# Altium PCB EV_PCB.PcbDoc
Units mm, origin at the board's own origin, x right, y up, seen from the top; angles counter-clockwise.
Board outline 110.4 x 66.4 mm, 2 copper layers (Top Layer, Bottom Layer); 33 components, 22 nets, 88 pads, 0 vias.
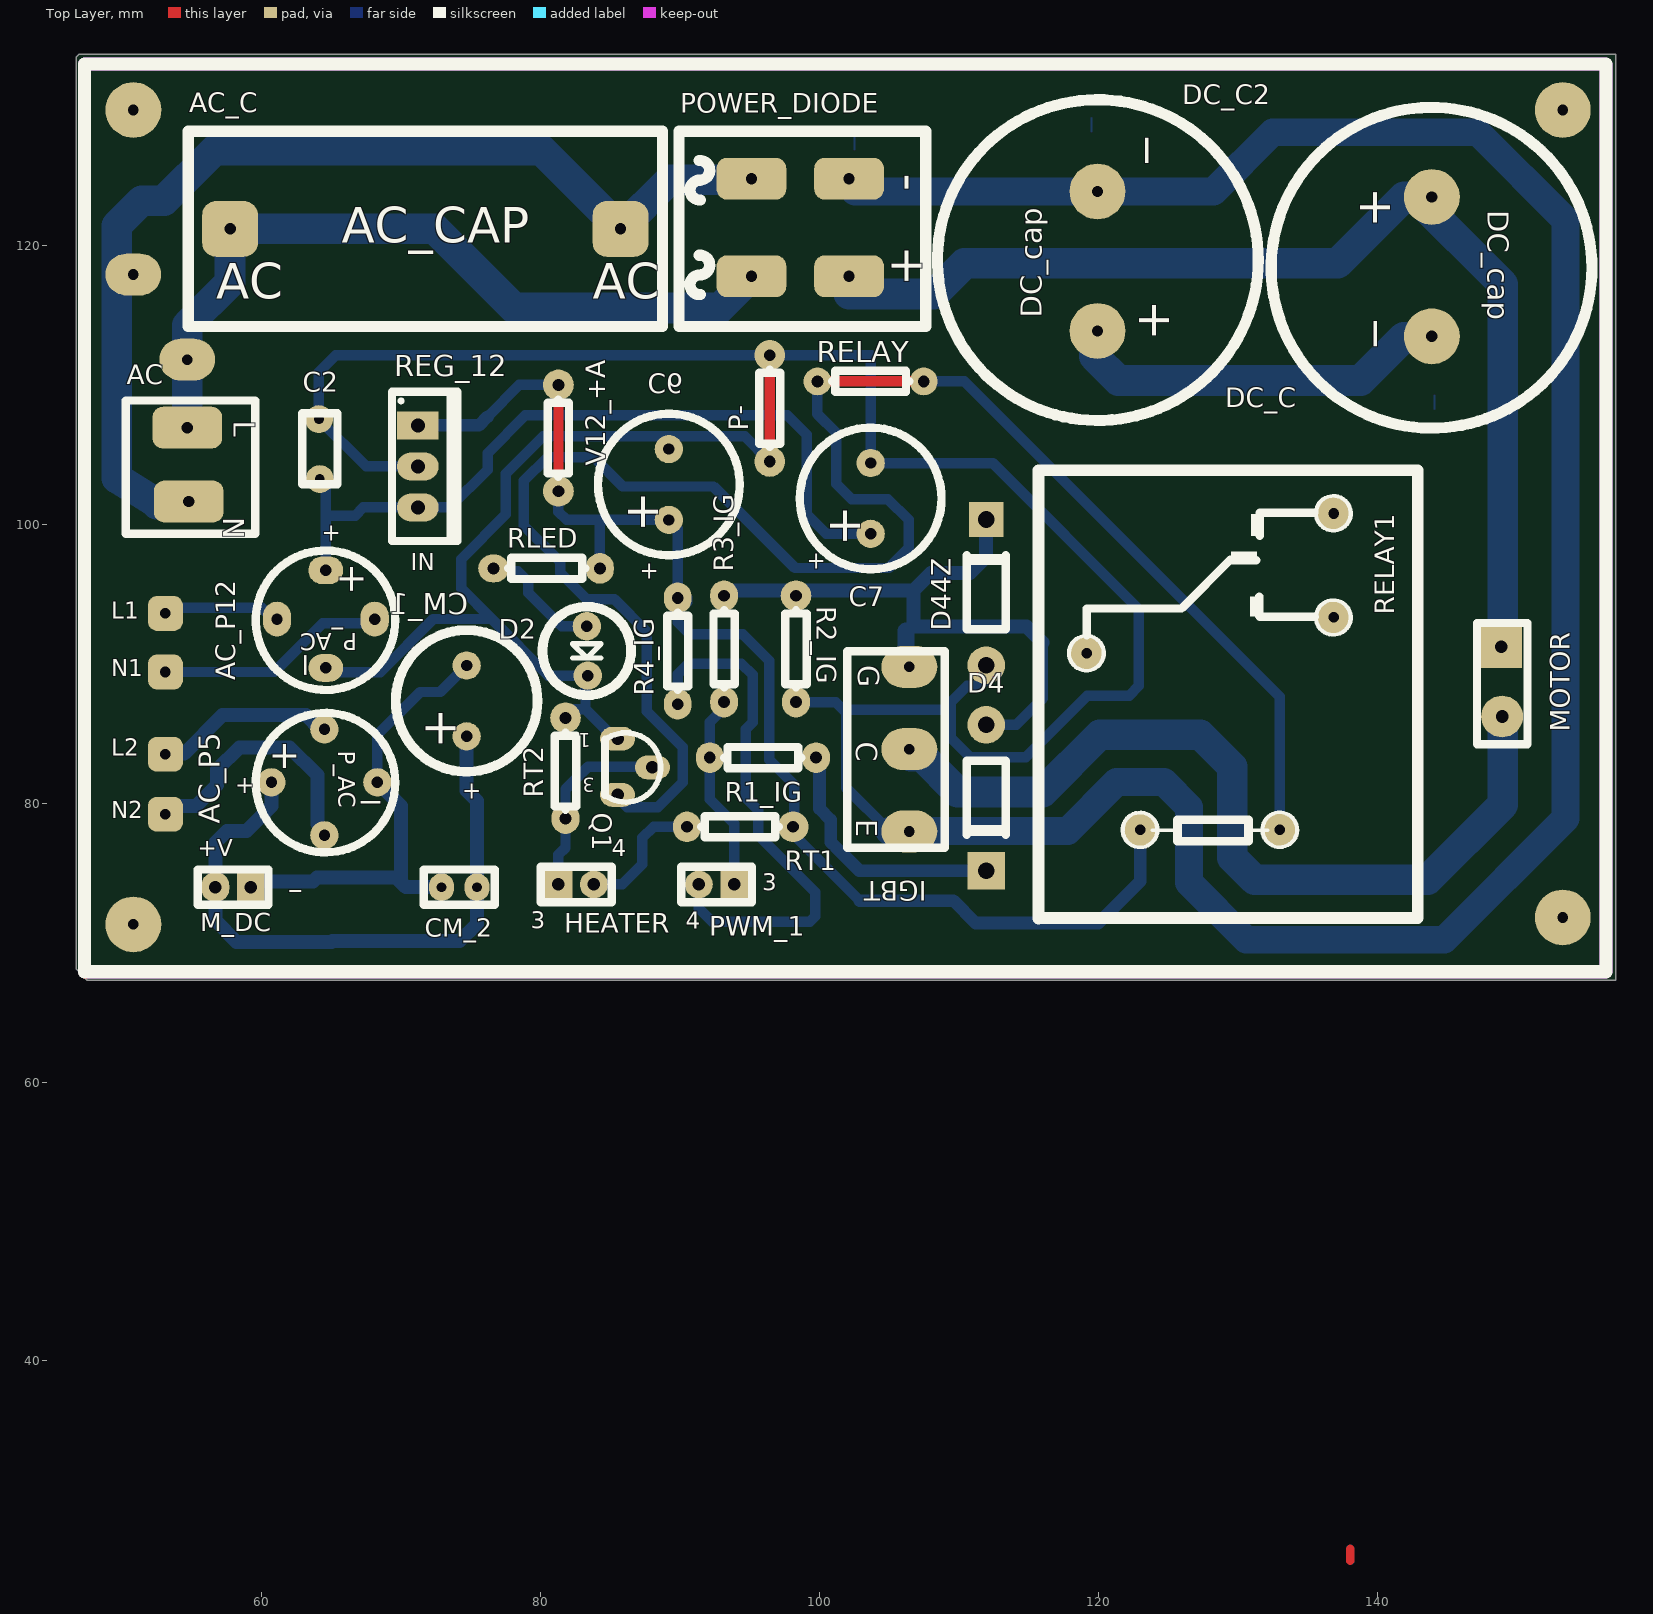
[diagram p0: Top Layer view]
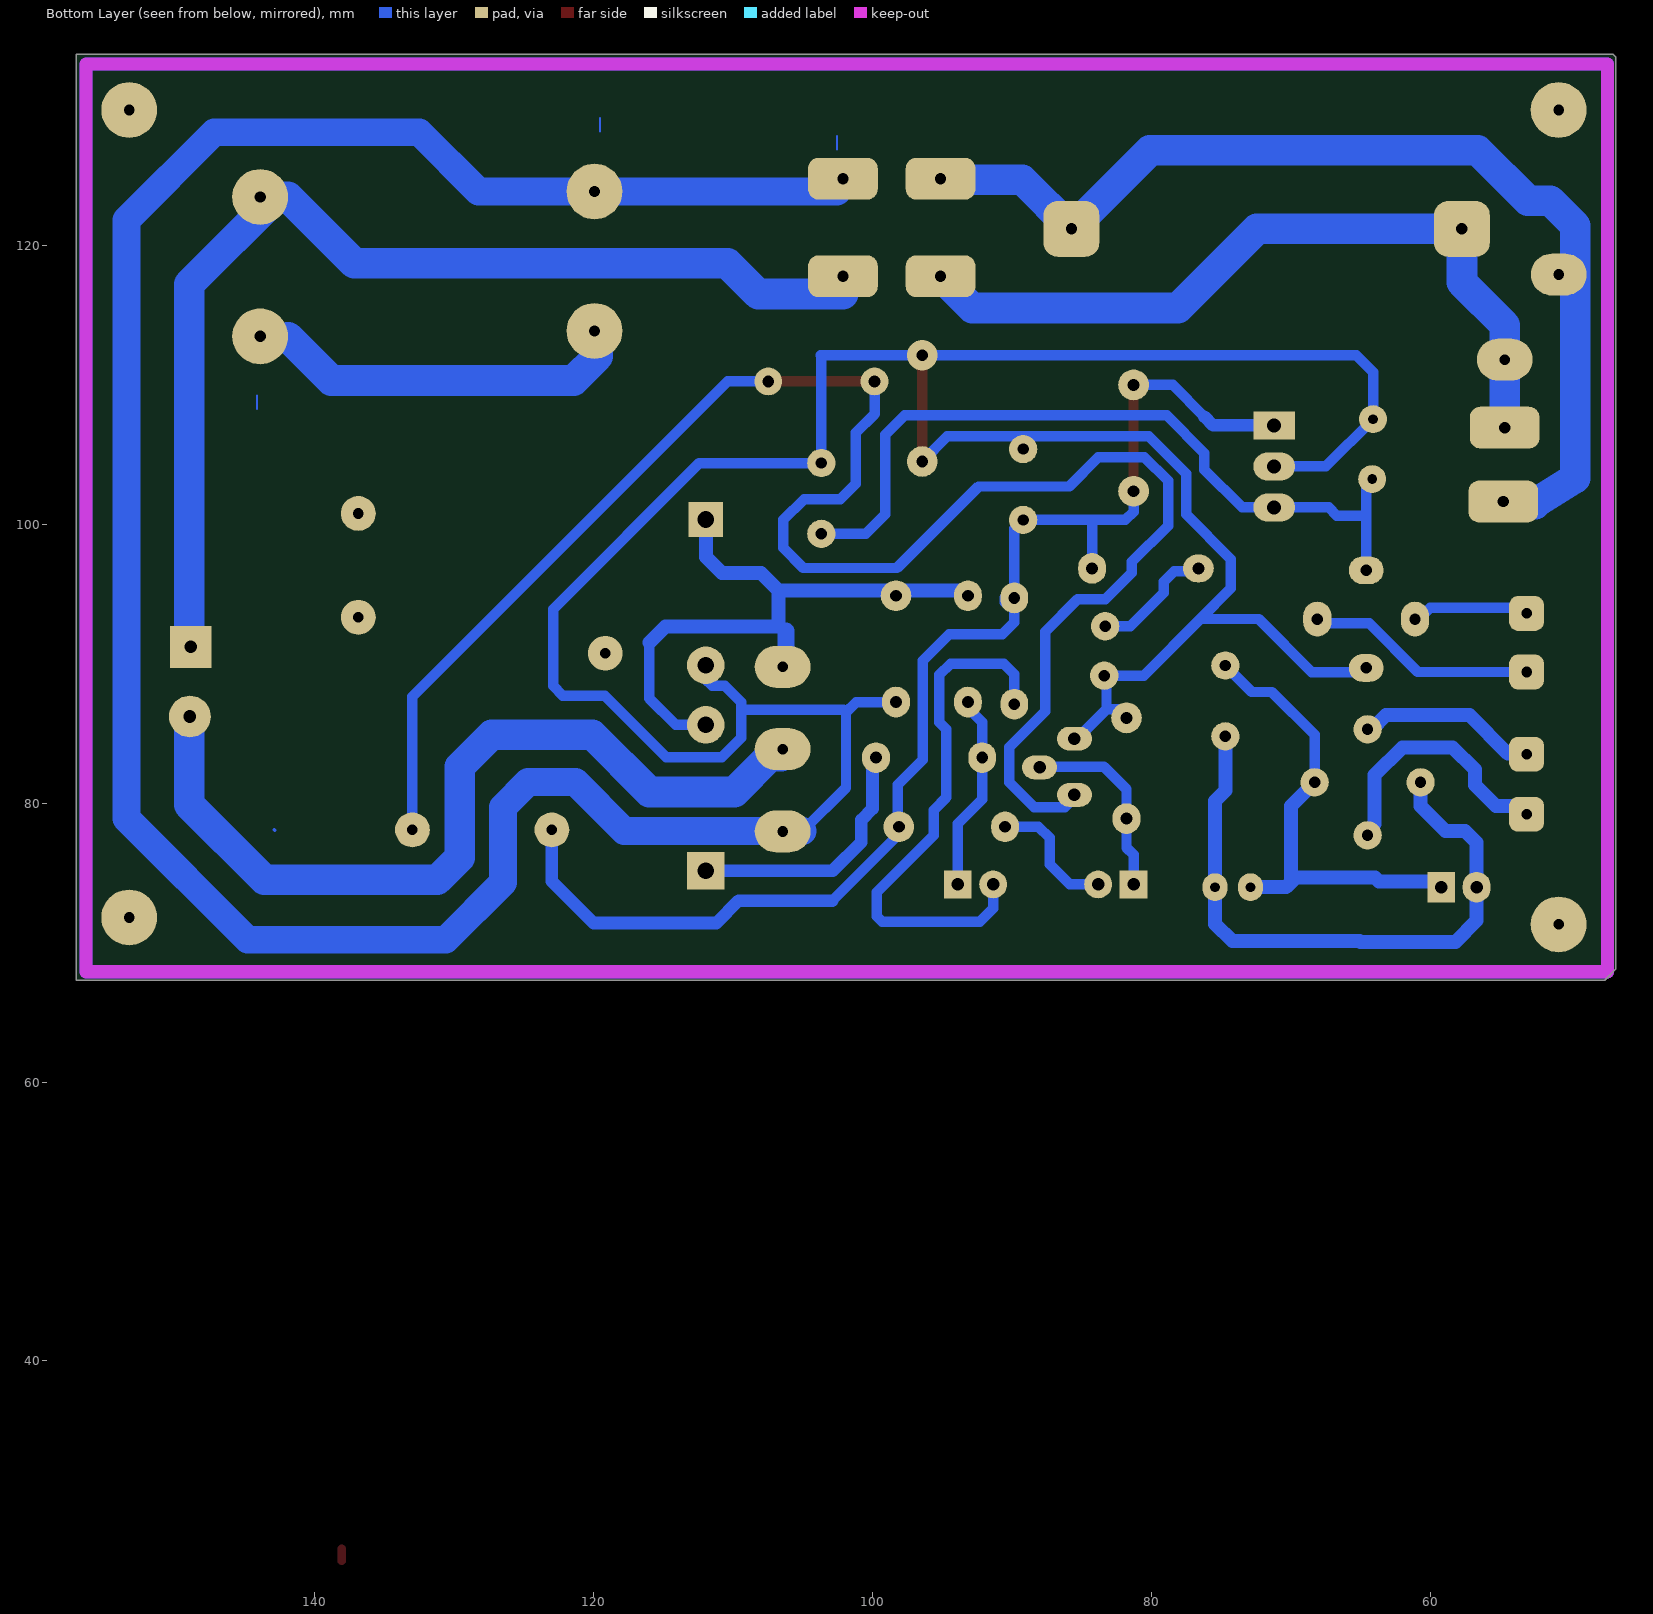
[diagram p1: Bottom Layer view, seen from below]

## Layer stack, top to bottom
Top Layer: signal copper 0.0356
Dielectric: dielectric 0.32, FR-4, Dk 4.8
Bottom Layer: signal copper 0.0356

## Board outline
157.1,133.7 157.1,67.3 47.5,67.3 46.7,68.1 46.7,133.5 46.9,133.7 157.1,133.7

## Design rules (kind name [scope] priority, off if disabled: settings)
Clearance [All] p1: gap=0.254
PolygonConnect [All] p1: connectstyle=Relief reliefconductorwidth=0.254 reliefentries=4 polygonreliefangle="90 Angle"
RoomDefinition EV_SH [InComponentClass('EV_SH')] p1: confinementstyle=ConfineIn formatcopy=TRUE lockcomponents=FALSE outline 161.1,31.5 185.1,31.5 185.1,58.2 161.1,58.2
RoutingLayers [All] p1: top layer_v5=FALSE bottom layer_v5=TRUE
RoutingVias [All] p1: holewidth=0.711 width=1.27 viastyle="Through Hole" minholewidth=0.711 minwidth=1.27 maxholewidth=0.711 maxwidth=1.27
SilkscreenOverComponentPads [All] p1: minsilkscreentomaskgap=0.254
SolderMaskExpansion [All] p1: expansion=0.102
Width [All] p1: maxlimit=2.5 minlimit=0.5 preferedwidth=1
26 further rules are at their usual default settings.

## Components (designator, comment, footprint, x,y, rotation, side; value= is the part's Value field where it differs from the comment)
AC "AC_IN" AC_IN 54.704,103.408 r180 top
AC_C "AC_CAP" AC_CAP_P 71.736,121.172 r270 top
AC_P5 "AC_POLE" AC_P#1 64.5,81.488 r270 top
AC_P12 "AC_POLE" AC_P#2 64.6,93.192 r180 top
C2 "Cap" RAD-0.1#1 64.172,105.4 r270 top
C6 "Cap Pol1" C_+ 89.18,102.764 r0 top
C7 "Cap Pol1" C_+ 103.648,101.764 r0 top
CM_1 "Cap Pol1" C_+ 74.676,87.244 r0 top
CM_2 "Cap" RAD-0.1#2 74.168,73.968 r180 top
D2 "LED0" LED0 83.264,91.032 r180 top
D4 "Diode 1N4007" DIO10.46-5.3x2.8#1 111.952,80.38 r270 top
D44Z "DZ18" DIO10.46-5.3x2.8#2 111.952,95.112 r90 top
DC_C "DC_CAP" DC_CAP_P 143.988,118.448 r180 top
DC_C2 "DC_CAP" DC_CAP_P 119.856,118.872 r0 top
HEATER "Header 2" HDR1X2#1 81.28,74.168 r0 top
IGBT "igbt_20n50" 20N50_S 106.064,97.748 r270 top
M_DC "Header 2" HDR1X2#2 59.22,73.968 r180 top
MOTOR "HEADER_B" HEADER_B 148.772,88.492 r90 top
P- "Res1" AXIAL-0.3#1 96.436,108.304 r90 top
POWER_DIODE "POWER_D" P_DIODE 98.52,121.272 r0 top
PWM_1 "Header 2" HDR1X2#1 93.888,74.168 r180 top
Q1 "2N3904" BCY-W3/E4 86.12,82.556 r180 top
R1_IG "Res1" AXIAL-0.3#2 95.944,83.256 r180 top
R2_IG "Res1" AXIAL-0.3#3 98.316,91.056 r90 top
R3_IG "Res1" AXIAL-0.3#4 93.16,91.056 r90 top
R4_IG "Res1" AXIAL-0.3#4 89.832,90.9 r270 top
REG_12 "LM78L12ACZ" T03B 71.196,104.14 r270 top
RELAY "Res1" AXIAL-0.3#5 103.664,110.236 r180 top
RELAY1 "RELAY" RELAY_OK 129.94,86.968 r90 top
RLED "Res1" AXIAL-0.3#6 80.44,96.828 r0 top
RT1 "Res1" AXIAL-0.3#7 94.299,78.301 r180 top
RT2 "Res1" AXIAL-0.3#8 81.788,82.296 r90 top
V12_+A "Res1" AXIAL-0.3#1 81.28,106.172 r90 top

## Footprints (in the part's own frame and the unit in brackets; to place one, negate y for a bottom-side part, rotate by r counter-clockwise, add the part's x,y. Pads: shape width x height; smd on the part's side, far side on the other; paste and mask are expansions set on the pad)
20N50_S [mm]
  oval 3x4 hole 0.762: 1(7.982,0.381) 2(13.882,0.381) 3(19.782,0.381)
  silkscreen extent 6.86,-4.06 20.95,2.92
AC_CAP_P [mm]
  rrect50% 4x4 hole 0.813: 1(0,-14) 2(0,14)
  silkscreen extent -7,-17 7,17
AC_IN [mm]
  rrect50% 5x3 hole 0.813: 1(0.035,-3.513) 2(-0.065,1.787)
  silkscreen extent -4.83,-5.46 4.45,4.11
AC_P#1 [mil]
  round 80 hole 32: 1(-149.61,0) 2(149.61,0) 3(0,149.61) 4(0,-149.61)
  silkscreen extent -196,-194 198,200
AC_P#2 [mil]
  oval 80x98.43 hole 32: 1(-137.8,0)
  oval 78.74x98.43 hole 32: 2(137.8,0)
  oval 98.43x78.74 hole 32: 3(0,137.8) 4(0,-137.8)
  silkscreen extent -196,-194 197,200
AXIAL-0.3#1 [mm] "Axial Device, Thru-Hole; 2 Leads; 0.3 in Pin Spacing"
  round 2.2 hole 0.85: 1(-3.81,0) 2(3.81,0)
  silkscreen extent -2.77,-0.76 2.77,0.76
AXIAL-0.3#2 [mm] "Axial Device, Thru-Hole; 2 Leads; 0.3 in Pin Spacing"
  oval 2x2.2 hole 0.85: 1(-3.81,0) 2(3.81,0)
  silkscreen extent -2.77,-0.76 2.77,0.76
AXIAL-0.3#3 [mm] "Axial Device, Thru-Hole; 2 Leads; 0.3 in Pin Spacing"
  oval 2.2x2 hole 0.85: 1(-3.81,0)
  round 2.2 hole 0.85: 2(3.81,0)
  silkscreen extent -2.77,-0.76 2.77,0.76
AXIAL-0.3#4 [mm] "Axial Device, Thru-Hole; 2 Leads; 0.3 in Pin Spacing"
  oval 2.2x2 hole 0.85: 1(-3.81,0) 2(3.81,0)
  silkscreen extent -2.77,-0.76 2.77,0.76
AXIAL-0.3#5 [mm] "Axial Device, Thru-Hole; 2 Leads; 0.3 in Pin Spacing"
  round 2 hole 0.85: 1(-3.81,0) 2(3.81,0)
  silkscreen extent -2.77,-0.76 2.77,0.76
AXIAL-0.3#6 [mm] "Axial Device, Thru-Hole; 2 Leads; 0.3 in Pin Spacing"
  oval 2.2x2 hole 0.85: 1(-3.81,0)
  oval 2x2.2 hole 0.85: 2(3.81,0)
  silkscreen extent -2.77,-0.76 2.77,0.76
AXIAL-0.3#7 [mm] "Axial Device, Thru-Hole; 2 Leads; 0.3 in Pin Spacing"
  round 2.2 hole 0.85: 1(-3.81,0)
  oval 2x2.2 hole 0.85: 2(3.81,0)
  silkscreen extent -2.77,-0.76 2.77,0.76
AXIAL-0.3#8 [mm] "Axial Device, Thru-Hole; 2 Leads; 0.3 in Pin Spacing"
  oval 2.2x2 hole 0.85: 1(-3.41,0)
  round 2.2 hole 0.85: 2(3.81,0)
  silkscreen extent -2.77,-0.76 2.77,0.76
BCY-W3/E4 [mm] "TO, Flat Index; 3 In-Line, Axial Leads; Body Dia. 4.5mm; Leads 0.51 x 0.48 mm (max)"
  oval 2.5x1.7 hole 0.9: 1(0.6,-2.06) 2(-1.9,0) 3(0.6,1.97)
  silkscreen extent -2.48,-2.48 1.5,2.48
C_+ [mil]
  round 80 hole 32: 1(0.79,-96.85) 2(0.79,103.15)
  silkscreen extent -199,-197 201,203
DC_CAP_P [mm]
  round 4 hole 0.813: 1(0.079,-5.016) 2(0.079,4.984)
  silkscreen extent -11.4,-11.44 11.6,11.56
DIO10.46-5.3x2.8#1 [mm] "Diode, Axial; Body 5.2 x 2.7 mm (LxDia. max), Lead Dia. 0.86 mm (max)"
  round 2.7 hole 1.2: 1(-5.23,0)
  rect 2.7x2.7 hole 1.2: 2(5.23,0)
  silkscreen extent -2.65,-1.4 2.75,1.4
DIO10.46-5.3x2.8#2 [mm] "Diode, Axial; Body 5.2 x 2.7 mm (LxDia. max), Lead Dia. 0.86 mm (max)"
  round 2.7 hole 1.2: 1(-5.23,0)
  rect 2.5x2.5 hole 1.2: 2(5.23,0)
  silkscreen extent -2.65,-1.41 2.75,1.4
HDR1X2#1 [mm] "Connector; Header; 2 Position"
  rect 2x2 hole 0.9: 1(0,0)
  round 2 hole 0.9: 2(2.54,0)
  silkscreen extent -1.27,-1.27 3.81,1.27
HDR1X2#2 [mm] "Connector; Header; 2 Position"
  rect 2x2.2 hole 0.9: 1(0,0)
  oval 2x2.2 hole 0.9: 2(2.54,0)
  silkscreen extent -1.27,-1.27 3.81,1.27
HEADER_B [mm]
  rect 3x3 hole 0.9: 1(2.704,-0.109)
  round 3 hole 0.9: 2(-2.284,-0.173)
  silkscreen extent -4.28,-1.99 4.42,1.63
LED0 [mil]
  round 80 hole 32: 1(-2.05,-64.88) 2(-4.57,74.49)
  silkscreen extent -127,-120 123,130
P_DIODE [mm]
  rrect50% 5x3 hole 0.813: 1(-3.4,-3.5) 2(-3.4,3.5) 3(3.6,3.5) 4(3.6,-3.5)
  silkscreen extent -8.6,-7.1 9.1,6.9
RAD-0.1#1 [mm] "Radial Cap, Thru-Hole; 2 Leads; 0.1 in Pin Spacing"
  round 2 hole 0.7: 1(-2.128,-0.064) 2(2.17,0)
  silkscreen extent -2.54,-1.27 2.54,1.27
RAD-0.1#2 [mm] "Radial Cap, Thru-Hole; 2 Leads; 0.1 in Pin Spacing"
  oval 1.8x2 hole 0.7: 1(-1.27,0) 2(1.27,0)
  silkscreen extent -2.54,-1.27 2.54,1.27
RELAY_OK [mm]
  round 2.5 hole 0.762: 1(-8.89,6.951) 2(-8.89,-3.049) 3(3.778,10.779) 4(6.35,-6.929) 5(13.8,-6.929)
  Bottom Layer lines w0.254: -8.922,-12.922 -8.89,-12.954
  silkscreen extent -15.24,-12.96 16.9,14.24
T03B [mm] "TO, Thru-Hole, Vertical, Heatsink Mounted; 3 In-Line Leads; Pitch 2.54 mm"
  rect 2x3 hole 1: 1(-2.94,0)
  oval 2x3 hole 1: 2(0,0) 3(2.94,0)
  silkscreen extent -5.35,-1.85 5.35,2.85, body extent -5.4,-1.9 5.4,2.9, height 19.4

## Part data
C2 CM_2: "Capacitor"
C6 C7 CM_1: "Polarized Capacitor (Radial)"
D2: "Typical INFRARED GaAs LED"
D4: "1 Amp General Purpose Rectifier"
D44Z: library part "Diode 1N4007", "1 Amp General Purpose Rectifier"
HEATER M_DC PWM_1: "Header, 2-Pin"
P- R1_IG R2_IG R3_IG R4_IG RELAY RLED RT1 RT2 V12_+A: "Resistor"
Q1: "NPN General Purpose Amplifier"
REG_12: "3-Terminal Positive Regulators"

## Free pads (board coordinates)
  oval 4x3 hole 0.762: 0(54.669,111.8) 1(50.8,117.9)
  rrect50% 2.5x2.5 hole 0.762 unplated: 1(53.1,79.2) 2(53.1,83.5)
  round 4 hole 0.762: 3(50.8,71.3) 3(50.8,129.7) 3(153.3,71.8) 3(153.3,129.7)
  rrect50% 2.5x2.5 hole 0.762: 3(53.1,89.4) 4(53.1,93.6)

## Nets (pads, with @x,y where several pads share a name; then routed paths per layer and width w, separated by ;. In a path a pad name is that pad's centre, name@x,y a point inside that pad or via, vN(x,y) a via of type N, cw(c..) or ccw(c..) an arc to the next point about the centre after c; other vN are vias at no path point)
GATE1: PWM_1.2 R4_IG.2 | length 38.4
  Bottom Layer w0.75: R4_IG.2 89.832,89.232 90.6,90 94.4,90 95.2,89.2 95.2,85.8 94.7,85.3 94.7,80.4 95.6,79.5 95.6,77.7 99.7,73.6 99.7,71.9 99.3,71.5 92.3,71.5 91.348,72.452 PWM_1.2
GATE22: PWM_1.1 R1_IG.2 R3_IG.1 | length 14.8
  Bottom Layer w0.75: R1_IG.2@92.4,82.99 R1_IG.2 ; R3_IG.1@93.6,87.246 92.134,85.78 R1_IG.2 ; PWM_1.1 93.888,78.512 92.134,80.266 R1_IG.2
H2: HEATER.1 Q1.2 RT2.1 | length 14
  Bottom Layer w0.75: HEATER.1 81.28,76.28 81.788,76.788 RT2.1 81.788,80.988 83.4,82.6 87.776,82.6 Q1.2@88.02,82.356
HEATER_F: HEATER.2 RT1.2 | length 9.5
  Bottom Layer w0.75: HEATER.2 85.868,74.168 87.3,75.6 87.3,77.5 88.101,78.301 RT1.2
LL: AC_P12.2 pad.4 | length 9
  Bottom Layer w0.75: pad.4@52.9,93.3 pad.4@53.15,93.55 ; pad.4 53.5,94 59.992,94 AC_P12.2@61.1,92.892
LLMICRO: AC_P5.2 pad.1@53.1,79.2 | length 17.9
  Bottom Layer w1: pad.1@53.1,79.8 55.3,79.8 56.8,81.3 56.8,82.4 58.4,84 62,84 64,82 64,78.488 AC_P5.2@64.2,78.288
NetAC_1: AC.1 AC_C.1 pad.0 POWER_DIODE.1 | length 56.3
  Bottom Layer w2.2: AC.1@54.669,106.8 54.669,114.269 57.736,117.336 AC_C.1 72.428,121.172 78.1,115.5 92.848,115.5 POWER_DIODE.1
NetAC_2: AC.2 AC_C.2 pad.1@50.8,117.9 POWER_DIODE.2 | length 75.4
  Bottom Layer w2.2: AC.2@52.479,101.421 AC.2@54.769,101.421 ; AC.2@52.479,101.521 49.6,103.3 49.6,121.4 51.4,123.2 53,123.2 56.6,126.8 80.108,126.8 AC_C.2 89.264,124.7 95.048,124.7 POWER_DIODE.2
NetAC_P5_3: AC_P5.3 CM_1.2 CM_2.2 M_DC.1 | length 34.3
  Bottom Layer w0.75: AC_P5.3 68.3,84.9 71.364,87.964 72.796,87.964 CM_1.2
  Bottom Layer w1: M_DC.1@59.2,74.368 63.668,74.368 63.976,74.676 70,74.676 ; AC_P5.3 70,79.788 70,74.676 ; CM_2.2 70.332,73.968 69.624,74.676 70,74.676
NetAC_P5_4: AC_P5.4 CM_1.1 CM_2.1 M_DC.2 | length 46.1
  Bottom Layer w1: AC_P5.4 60.7,79.8 58.9,78 57.5,78 56.68,77.18 M_DC.2 56.68,71.566 58.2,70.046 65.019,70.046 65.073,70.1 74.2,70.1 75.438,71.338 CM_2.1 75.438,80.162 74.696,80.904 CM_1.1
NetD2_1: D2.1 RLED.1 | length 8.8
  Bottom Layer w0.75: RLED.1@76.63,96.628 78.372,96.628 79.13,95.87 79.13,95.066 81.516,92.68 D2.1
NetD4_1: D4.1 D44Z.2 IGBT.1 R2_IG.2 R3_IG.2 | length 47
  Bottom Layer w0.75: IGBT.1@106.2,89.611 IGBT.1@106.445,89.366 ; D4.1 114.11,85.61 116,87.5 116,91.5
  Bottom Layer w1: R3_IG.2@93.2,94.5 93.945,95.245 106.745,95.245 ; D44Z.2 111.952,97.652 110.8,96.5 108,96.5 106.745,95.245 ; 116,91.5 114.834,92.666 106.745,92.666 106.745,95.245
  Bottom Layer w1.2: IGBT.1@106.2,89.611 106.2,92.366
NetD4_2: D4.2 R1_IG.1 | length 18.5
  Bottom Layer w0.9: R1_IG.1@99.7,83.256 100,82.956 100,79.6 100.8,78.8 100.8,77.2 102.85,75.15 D4.2
NetDC_C2_1: DC_C2.1 DC_C.2 | length 30.5
  Bottom Layer w2.2: DC_C2.1@119.7,113.9 119.7,112.031 121.431,110.3 138.8,110.3 ; 138.8,110.3 141.909,113.409 138.8,110.3
NetIGBT_2: IGBT.2 MOTOR.2 | length 62.4
  Bottom Layer w0.75: IGBT.2@106.1,84.4 IGBT.2@106.539,83.961
  Bottom Layer w2.2: IGBT.2@106.539,83.361 107.339,83.361 109.9,80.8 116,80.8 120.1,84.9 127.3,84.9 129.6,82.6 129.6,76.1 131.2,74.5 143.6,74.5 149,79.9 149,85.8 MOTOR.2@148.8,86
NN: AC_P12.1 pad.3@53.1,89.4 | length 16.4
  Bottom Layer w0.75: pad.3@53.1,89.4 60.9,89.4 64.392,92.892 AC_P12.1@68.1,92.892
NNMICRO: AC_P5.1 pad.2 | length 12.7
  Bottom Layer w1: pad.2 53.15,83.55 54.45,83.55 57.2,86.3 63.188,86.3 AC_P5.1@64.2,85.288
P+: AC_P12.4 C2.2 C7.1 REG_12.3 | length 56.9
  Bottom Layer w0.75: C2.2 64.6,102.802 64.6,100.6 ; AC_P12.4@64.6,96.392 AC_P12.4@65,96.792 ; AC_P12.4 64.6,100.6 ; C7.1 100.496,99.304 99.1,100.7 99.1,106.4 97.7,107.8 78.9,107.8 76.2,105.1 76.2,103.9 73.5,101.2 REG_12.3 67.3,101.2 66.7,100.6 64.6,100.6
P-: AC_P12.3 C2.1 C6.2 C7.2 D2.2 D44Z.1 DC_C2.2 IGBT.3 P-.1 P-.2 POWER_DIODE.3 Q1.1 R2_IG.1 REG_12.2 RT2.2 | length 366.4
  Top Layer w0.75: P-.1 P-.2
  Bottom Layer w0.75: AC_P12.3@64.6,89.392 68.492,89.392 72.3,93.2 76.5,93.2 ; REG_12.2 67.496,104.14 C2.1 64.1,107.536 64.1,110.9 65.314,112.114 67.314,112.114 67.8,112.114 P-.2 ; RT2.2 82.398,86.716 83.22,86.716 ; Q1.1@85.52,84.416 83.22,86.716 ; C6.2 C6.2@89.2,106.3 ; P-.1 94.63,106.3 C6.2@89.2,106.3 ; R2_IG.1 101.154,87.246 101.9,86.5 ; 98.486,112.114 P-.2 ; IGBT.3@105,78 101.9,81.1 101.9,86.5 ; 109.4,86.9 109.4,87.218 110.582,88.4 111.5,88.4 111.952,88.852 D44Z.1 D44Z.1@111.634,90.2 ; 76.5,93.2 74.3,95.4 74.3,97.5 77.5,100.7 77.5,103.6 80.2,106.3 C6.2@89.2,106.3 ; 76.5,93.2 80.56,89.14 D2.2 83.22,88.98 83.22,86.716 ; P-.2 103.7,112.114 103.668,112.082 C7.2 112.416,104.384 122.9,93.9 122.9,88.4 122.2,87.7 119.2,87.7 114.8,83.3 110.8,83.3 109.4,84.7 109.4,86.7 102.1,86.7 101.9,86.5
  Bottom Layer w2: POWER_DIODE.3@102.556,123.856 119.535,123.856 128.256,123.856 132.5,128.1 147.2,128.1 153.5,121.8 153.5,78.9 144.8,70.2 130.6,70.2 126.5,74.3 126.5,79.7 124.7,81.5 121.3,81.5 117.8,78 IGBT.3@105,78
P_+: DC_C.1 MOTOR.1 POWER_DIODE.4 | length 77.7
  Bottom Layer w2.2: POWER_DIODE.4@102.12,116.5 108.2,116.5 110.4,118.7 137.145,118.7 141.909,123.464 142.736,123.464 149,117.2 MOTOR.1@149,91.9
RELAY1: Q1.3 RELAY1.2 RELAY.1 RELAY.2 | length 133.6
  Top Layer w0.75: RELAY.2 RELAY.1
  Bottom Layer w0.75: Q1.3@85.52,80.386 86.206,79.7 88.4,79.7 90.2,81.5 90.2,84 87.6,86.6 87.6,92.3 85.3,94.6 83.3,94.6 81.4,96.5 81.4,97.3 78.8,99.9 78.8,103.1 80.5,104.8 83.8,104.8 85.9,102.7 92.4,102.7 98.244,96.856 104.956,96.856 106.4,98.3 106.4,100.3 104.9,101.8 102.3,101.8 101.2,102.9 101.2,106.554 99.854,107.9 RELAY.2 ; RELAY.1 110.364,110.236 132.989,87.611 RELAY1.2
V12_+: C6.1 R4_IG.1 REG_12.1 RELAY1.1 RLED.2 RT1.1 V12_+A.1 V12_+A.2 | length 93.4
  Top Layer w0.75: V12_+A.1@81.284,102.362 V12_+A.2@81.284,109.982
  Bottom Layer w0.75: 76.204,107.704 78.482,109.982 V12_+A.2 ; V12_+A.1 81.28,100.9 81.876,100.304 84.2,100.304 ; RLED.2@84.25,96.628 RLED.2 84.25,100.254 84.2,100.304 ; R4_IG.1@90.532,94.4 R4_IG.1@90.532,94.71 ; 102.9,73 98.2,77.7 98.2,81.3 96.4,83.1 96.4,90.2 94.5,92.1 90.7,92.1 89.832,92.968 R4_IG.1 89.832,99.672 C6.1 84.2,100.304
  Bottom Layer w0.9: REG_12.1 75.58,107.08 76.204,107.704 ; 102.9,73 109.6,73 111.2,71.4 120,71.4 122.989,74.389 RELAY1.1
pads on no net: RELAY1.3 RELAY1.4 RELAY1.5
copper on no net: | length 349.3
  Top Layer w0.6: 138.049,25.654 138.049,26.543
  Bottom Layer w0.95: 47.3,67.9 47.3,133 156.4,133 156.4,67.9 47.3,67.9

## Keep-outs
Keep-Out Layer:
  lines w0.95: 47.3,67.9 156.4,67.9 156.4,133 47.3,133 47.3,67.9

## Other copper
Bottom Layer:
  text "_" at 119.1,128.1 h1.52 r90
  text "_" at 102.1,126.8 h1.52 r90
  text "_" at 143.7,108.2 h1.52 r90

## Silkscreen, mask and mechanical layers (free items; w line width, h text height)
Top Overlay:
  lines w0.95: 47.3,67.9 47.3,133 156.4,133 156.4,67.9 47.3,67.9
  text "+" at 64.3,98.8 h1.2
  text "+" at 99.1,96.8 h1.2
  text "IN" at 70.7,96.7 h1.2
  text "+" at 87.1,96.1 h1.2
  text "L1" at 49.2,93.2 h1.2
  text "N1" at 49.2,89.1 h1.2
  text "L2" at 49.2,83.4 h1.2
  text "+" at 58.1,80.7 h1.2
  text "+" at 74.4,80.3 h1.2
  text "N2" at 49.2,78.9 h1.2
  text "+V" at 55.4,76.2 h1.2
  text "4" at 85.1,76.2 h1.2
  text "_" at 62,74 h1.2
  text "3" at 95.9,73.7 h1.2
  text "3" at 79.3,71 h1.2
  text "4" at 90.4,71 h1.2

## Text inside footprints (layer, text, board x,y; h text height)
AC: Top Overlay "L" at 58,107.4 h1.52 r270; Top Overlay "N" at 57.244,100.487 h1.52 r270
AC_C: Top Overlay "AC" at 56.736,116.172 h2.54; Top Overlay "AC" at 83.736,116.172 h2.54
AC_P5: Top Overlay "P_AC" at 65.5,83.738 h1.2 r270; Top Overlay "+" at 60.5,82.488 h2; Top Overlay "_" at 68.5,79.488 h2 r180
AC_P12: Top Overlay "_" at 62.6,89.192 h2 r90; Top Overlay "+" at 65.6,97.192 h2 r270; Top Overlay "P_AC" at 66.85,92.192 h1.2 r180
C6: Top Overlay "+" at 88.438,99.415 h2.54 r90
C7: Top Overlay "+" at 102.906,98.415 h2.54 r90
CM_1: Top Overlay "+" at 73.934,83.895 h2.54 r90
DC_C: Top Overlay "DC_cap" at 147.925,122.512 h1.52 r270; Top Overlay "_" at 140.559,114.511 h2.54 r270; Top Overlay "+" at 138.781,124.163 h2.54 r270
DC_C2: Top Overlay "DC_cap" at 115.919,114.808 h1.52 r90; Top Overlay "_" at 122.8,125.9 h2.54 r90; Top Overlay "+" at 125.063,113.157 h2.54 r90
IGBT: Top Overlay "G" at 102.762,89.874 h1.5 r270; Top Overlay "C" at 102.635,84.413 h1.5 r270; Top Overlay "E" at 102.635,78.825 h1.5 r270
POWER_DIODE: Top Overlay "-" at 107.22,123.872 h2.54 r90; Top Overlay "+" at 107.32,117.072 h2.54 r90
Q1: Top Overlay "1" at 83.6,85 h1 r180; Top Overlay "3" at 83.9,81.8 h1 r180